# Altium PCB BackPCB.PcbDoc
Units mil, origin at the board's own origin, x right, y up, seen from the top; angles counter-clockwise.
Board outline 2440 x 3030 mil, 2 copper layers (Top Layer, Bottom Layer); 10 components, 15 nets, 96 pads, 2 vias.
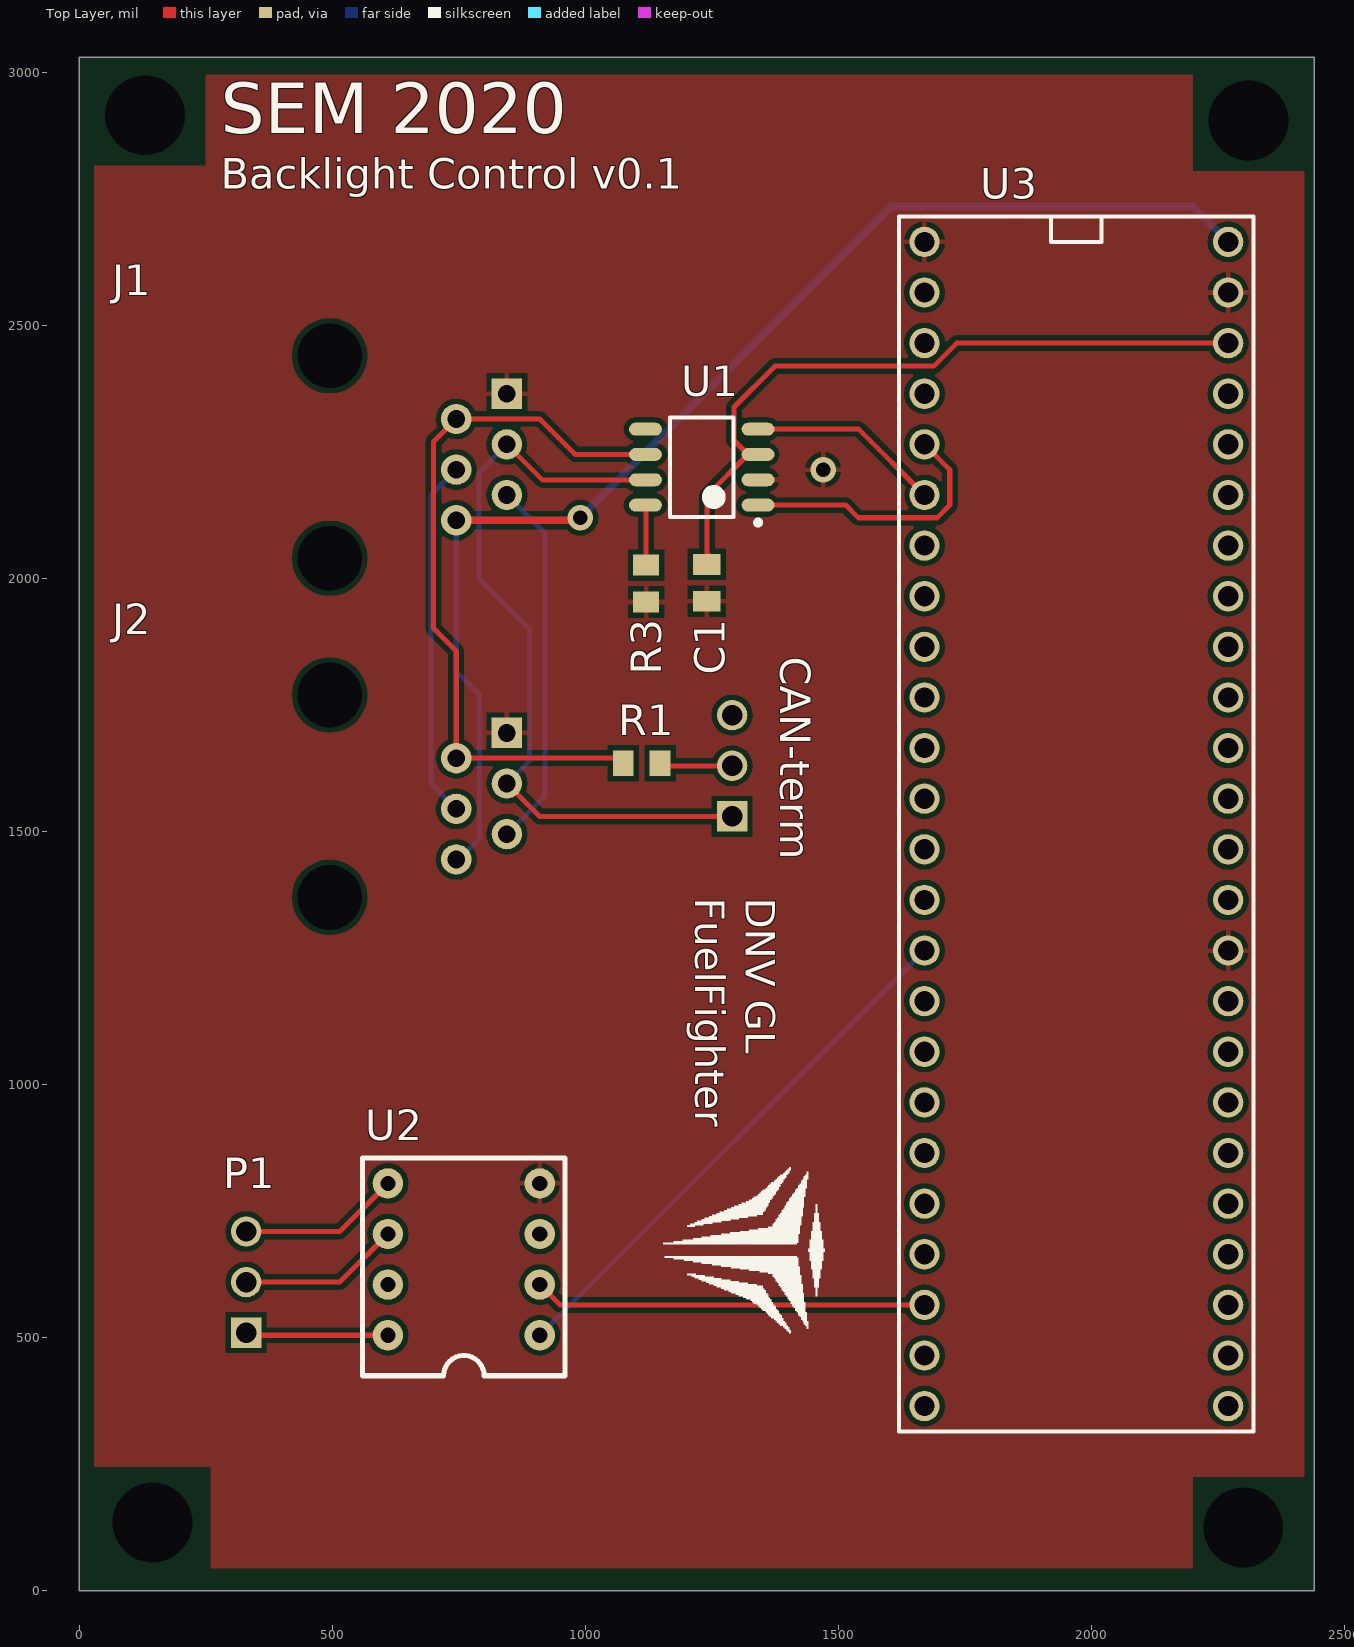
[diagram p0: Top Layer view]
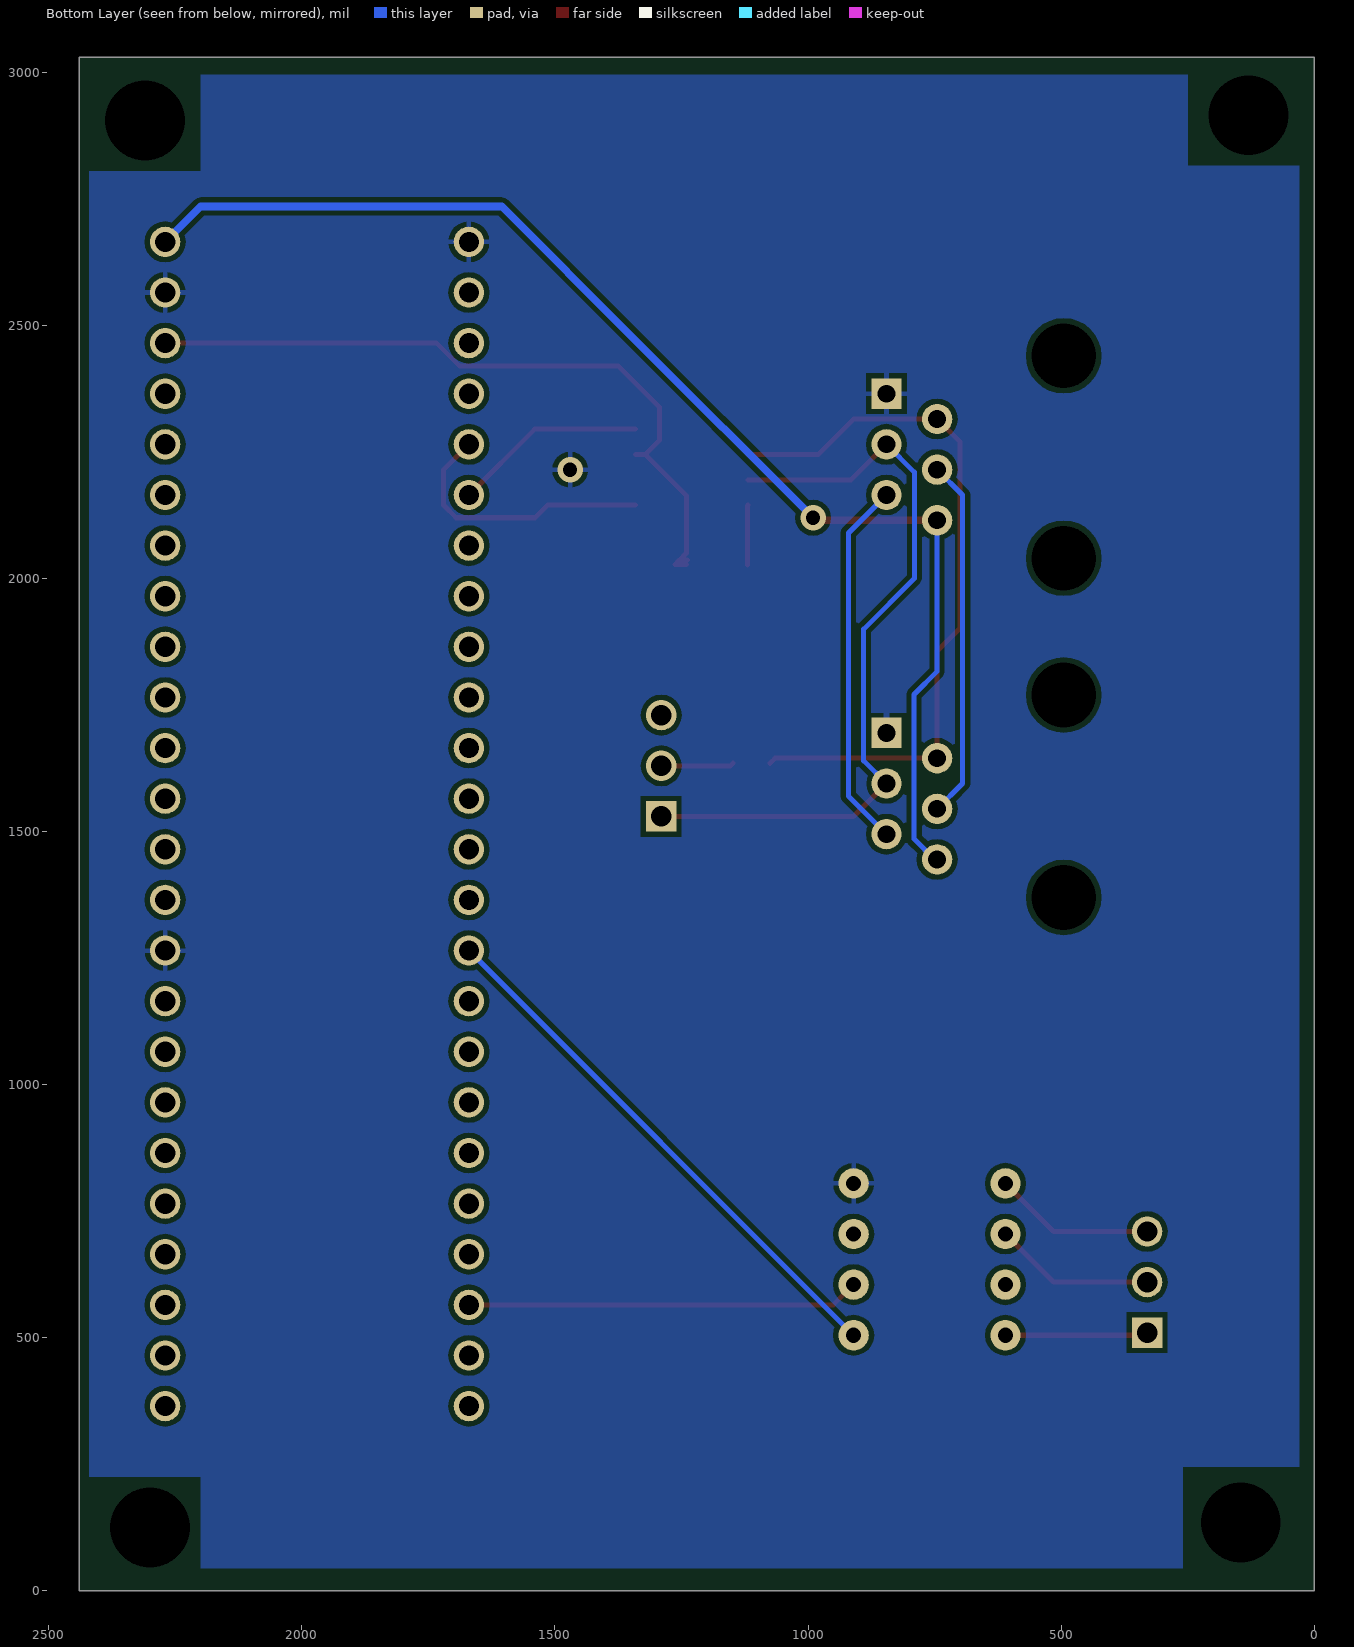
[diagram p1: Bottom Layer view, seen from below]

## Layer stack, top to bottom
Top Solder: solder mask 0.4, Solder Resist, Dk 3.5
Top Layer: signal copper 1.4
Dielectric 1: dielectric 12.6, FR-4, Dk 4.8
Bottom Layer: signal copper 1.4
Bottom Solder: solder mask 0.4, Solder Resist, Dk 3.5

## Board outline
0,3030 2440,3030 2440,0 0,0

## Design rules (kind name [scope] priority, off if disabled: settings)
Clearance [All] p1: gap=10 ignorepadtopadclearanceinfootprint=FALSE except(0: Arc-Hole Track-Hole SMDPad-Hole THPad-Hole Via-Hole Fill-Hole Poly-Hole Region-Hole Text-Hole)
HoleSize [All] p1: absolutevalues=TRUE maxlimit=190 minlimit=1 maxpercent=80.000 minpercent=20.000
PolygonConnect [All] p1: connectstyle=Relief reliefconductorwidth=10 reliefentries=4 polygonreliefangle="90 Angle" airgapwidth=10
RoomDefinition BackPCB [InComponentClass('BackPCB')] p1: confinementstyle=ConfineIn formatcopy=TRUE lockcomponents=FALSE outline 0,0 2440,0 2440,3030 0,3030
RoutingVias [All] p1: holewidth=28 width=50 viastyle="Through Hole" minholewidth=28 minwidth=50 maxholewidth=28 maxwidth=50
SolderMaskExpansion [All] p1: expansion=4
Width [All] p1: maxlimit=20 minlimit=10 preferedwidth=10
29 further rules are at their usual default settings.

## Components (designator, comment, footprint, x,y, rotation, side; value= is the part's Value field where it differs from the comment)
C1 "SMD" C_SMD_0805_pcb 1240,1991.42 r270 top value=100n
CAN-term "Header3" PIN_HEADER_M_1x3 1290,1730 r270 top
J1 "RJ11" RJ11_Connector 495,2440 r270 top
J2 "RJ11" RJ11_Connector 495,1770 r270 top
P1 "1x3_M" PIN_HEADER_M_1x3 330,710 r270 top
R1 "SMD" R_SMD_0805_pcb 1111.42,1635 r0 top value=120
R3 "SMD" R_SMD_0805_pcb 1120,1990 r90 top value=22k
U1 "SN65GVD231d" SN65HVD231D_SMD 1230,2220 r180 top
U2 "IL_710-2E_DIGITAL_ISOLATOR" IL_710-2E_DIP8 910,505 r180 top
U3 "teensy_3.6" teensy_3.6 1645,2740 r0 top

## Footprints (in the part's own frame and the unit in brackets; to place one, negate y for a bottom-side part, rotate by r counter-clockwise, add the part's x,y. Pads: shape width x height; smd on the part's side, far side on the other; paste and mask are expansions set on the pad)
C_SMD_0805_pcb [mm] "Chip Capacitor, 2-Leads, Body 2,00x1,25mm, IPC Medium Density"
  rect 1.05x1.4 smd: 1(-0.925,0) 2(0.925,0)
  body extent -1.07,-0.63 1.08,0.63, height 0.8
IL_710-2E_DIP8 [mil]
  round 60 hole 30: 1(0,0) 2(0,-100) 3(0,-200) 4(0,-300) 5(300,-300) 6(300,-200) 7(300,-100) 8(300,0)
  silkscreen extent -50,-350 350,80
PIN_HEADER_M_1x3 [mil]
  rect 60x60 hole 40.16: 1(200,0)
  round 60 hole 40.16: 2(100,0) 3(0,0)
  body extent -50,-50 250,50, height 328
R_SMD_0805_pcb [mm]
  rect 1.05x1.3 smd: 1(-0.925,0) 2(0.925,0)
  body extent -1.07,-0.63 1.08,0.63, height 0.8
RJ11_Connector [mil]
  rect 60x60 hole 35.04: 1(75,350)
  round 60 hole 35.04: 2(125,250) 3(175,350) 4(225,250) 5(275,350) 6(325,250)
  round 60 hole 127.95 unplated: ""(0,0) ""(400,0)
  body extent -80,-430 475,425, height 618
SN65HVD231D_SMD [mm]
  oval 1.65x0.65 smd: 1(-2.825,1.905) 2(-2.825,0.635) 3(-2.825,-0.635) 4(-2.825,-1.905) 5(2.825,-1.905) 6(2.825,-0.635) 7(2.825,0.635) 8(2.825,1.905)
  silkscreen extent -2.95,-2.5 1.6,2.9, body extent -2,-2.5 2,2.5, height 1.75
teensy_3.6 [mil]
  round 60 hole 40: 0(25,-175) 1(25,-275) 2(25,-375) 3(25,-475) 4(25,-575) 5(25,-675) 6(25,-775) 7(25,-875) 8(25,-975) 9(25,-1075) 10(25,-1175) 11(25,-1275) 12(25,-1375) 13(625,-1375) 14(625,-1275) 15(625,-1175) 16(625,-1075) 17(625,-975) 18(625,-875) 19(625,-775) 20(625,-675) 21(625,-575) 22(625,-475) 23(625,-375) 24(25,-1575) 25(25,-1675) 26(25,-1775) 27(25,-1875) 28(25,-1975) 29(25,-2075) 30(25,-2175) 31(25,-2275) 32(25,-2375) 33(625,-2375) 34(625,-2275) 35(625,-2175) 36(625,-2075) 37(625,-1975) 38(625,-1875) 39(625,-1775) +3V3(25,-1475) +3V3(625,-275) A21(625,-1675) A22(625,-1575) AGND(625,-175) GND(25,-75) GND(625,-1475) VIN(625,-75)
  silkscreen extent -25,-2425 675,-25, body extent -25,-2425 675,-25, height 496

## Part data
C1: library part C_SMD_0805
CAN-term P1: library part PIN_HEADER_M_1x3
J1 J2: library part RJ11_Connector
R1 R3: library part R_SMD_0805
U1: library part SN65HVD231D_SMD
U2: "Digital Isolator 3-5V input/output."

## Free pads (board coordinates)
  round 60 hole 157.48: 2(2310,2905) 3(130,2915) 4(145,135) 5(2300,125)

## Via types
v1: diameter 50, hole 28, Top Layer to Bottom Layer, 2 vias

## Nets (pads, with @x,y where several pads share a name; then routed paths per layer and width w, separated by ;. In a path a pad name is that pad's centre, name@x,y a point inside that pad or via, vN(x,y) a via of type N, cw(c..) or ccw(c..) an arc to the next point about the centre after c; other vN are vias at no path point)
3V3: C1.1 U1.3 U2.1 U3.+3V3 | length 2562.3
  Top Layer w10: C1.1@1238.44,2036.28 C1.1@1254.11,2036.28 ; C1.1 C1.1@1246.89,2027.83 ; U1.3 U1.3@1321.54,2245 ; U3.+3V3@1661.36,1273.64 1670,1265 U3.+3V3@1678.64,1273.64 ; U3.+3V3@2270,2465 1733.64,2465 1688.18,2419.54 1374.54,2419.54 1293.74,2338.74 1293.74,2272.8 U1.3@1321.54,2245 ; C1.1@1246.89,2027.83 1262.56,2027.83 C1.1@1254.72,2035.67 ; C1.1@1246.89,2027.83 C1.1@1254.72,2035.67 ; C1.1@1254.11,2036.28 1240,2050.39 1240,2163.46 U1.3@1321.54,2245 ; C1.1@1254.11,2036.28 C1.1@1254.72,2035.67
  Bottom Layer w10: U2.1 U3.+3V3@1670,1265
+5: J1.6 J2.6 U3.VIN | length 2533.9
  Top Layer w10: v1@985,2115 v1(990,2120)
  Top Layer w15: J1.6 v1@985,2115
  Bottom Layer w10: J2.6 750,1445 790.86,1485.86 790.86,1770.74 745,1816.59 J1.6 J1.6@753.64,2123.64
  Bottom Layer w15: v1(990,2120) 1345,2475 1605,2735 2200,2735 U3.VIN
GND: C1.2 J1.1 J2.1 R3.1 U1.2 U2.4 U3.AGND U3.GND
  other v1: 1470,2215
NetCAN-term_1: CAN-term.1 J1.3 J2.3 U1.7 | length 1527.5
  Top Layer w10: J2.3 910,1530 CAN-term.1 ; J1.3 915,2195 U1.7
  Bottom Layer w10: J2.3 890,1640 890,1900 790,2000 790,2210 J1.3
NetCAN-term_2: CAN-term.2 R1.2 | length 144.2
  Top Layer w10: R1.2 1152.83,1630 CAN-term.2
NetJ1_2: J1.2 J2.2 R1.1 U1.6 | length 1444.2
  Top Layer w10: R1.1 1065,1645 J2.2 745,1856.76 700,1901.76 700,2270 J1.2 909.94,2315 979.94,2245 U1.6
NetJ1_4: J1.4 J2.4 | length 711.4
  Bottom Layer w10: J2.4 695,1595 695,2165 J1.4
NetJ1_5: J1.5 J2.5 | length 732.1
  Bottom Layer w10: J2.5 920,1570 920,2090 J1.5
NetP1_1: P1.1 U2.8 | length 282.1
  Top Layer w10: P1.1 335,505 U2.8
NetP1_2: P1.2 U2.6 | length 319.4
  Top Layer w10: P1.2 515,610 U2.6
NetP1_3: P1.3 U2.5 | length 319.4
  Top Layer w10: P1.3 515,710 U2.5
NetR3_2: R3.2 U1.8 | length 119.1
  Top Layer w10: U1.8 1120,2143.78 R3.2
NetU1_1: U1.1 U3.3 | length 540.2
  Top Layer w10: U1.1 1514.38,2145 1539.38,2120 1695,2120 1720,2145 1720,2215 U3.3
NetU1_4: U1.4 U3.4 | length 382.6
  Top Layer w10: U1.4 1540,2295 U3.4
NetU2_2: U2.2 U3.30 | length 776.6
  Top Layer w10: U2.2 950,565 U3.30
pads on no net: CAN-term.3 J1. J2. U1.5 U2.3 U2.7 U3.0 U3.1 U3.2 U3.5 U3.6 U3.7 U3.8 U3.9 U3.10 U3.11 U3.12 U3.13 U3.14 U3.15 U3.16 U3.17 U3.18 U3.19 U3.20 U3.21 U3.22 U3.23 U3.24 U3.25 U3.26 U3.27 U3.28 U3.29 U3.31 U3.32 U3.33 U3.34 U3.35 U3.36 U3.37 U3.38 U3.39 U3.A21 U3.A22
copper on no net: | length 5
  Top Layer w10: 2265,1965 2270,1965

## Polygon pours and split planes (outlines as drawn)
GND on Bottom Layer "Bottom Layer-GND" (solid, pour order 6): 260,45 260,245 30,245 30,2815 250,2815 250,2995 2200,2995 2200,2805 2420,2805 2420,225 2200,225 2200,45
GND on Top Layer "Top Layer-GND" (solid, pour order 4): 260,45 260,245 30,245 30,2815 250,2815 250,2995 2200,2995 2200,2805 2420,2805 2420,225 2200,225 2200,45

## Silkscreen, mask and mechanical layers (free items; w line width, h text height)
Top Overlay:
  drawing of 5 lines, arcs and shapes, not listed
  text "SEM 2020" at 280,2880 h100
  text "Backlight Control v0.1" at 280,2770 h60
  text "DNV GL / FuelFighter" at 1197.39,1369.08 h100 r270
Mechanical 1:
  lines w10: 10,10 10,3020 2430,3020 2430,10 10,10